# Altium PCB Micromouse_PCB.PcbDoc (part 2 of 3)
Units mm, origin at the board's own origin, x right, y up, seen from the top; angles counter-clockwise.
Board outline 75.15 x 115 mm, 2 copper layers (Top Layer, Bottom Layer); 124 components, 112 nets, 418 pads, 146 vias.
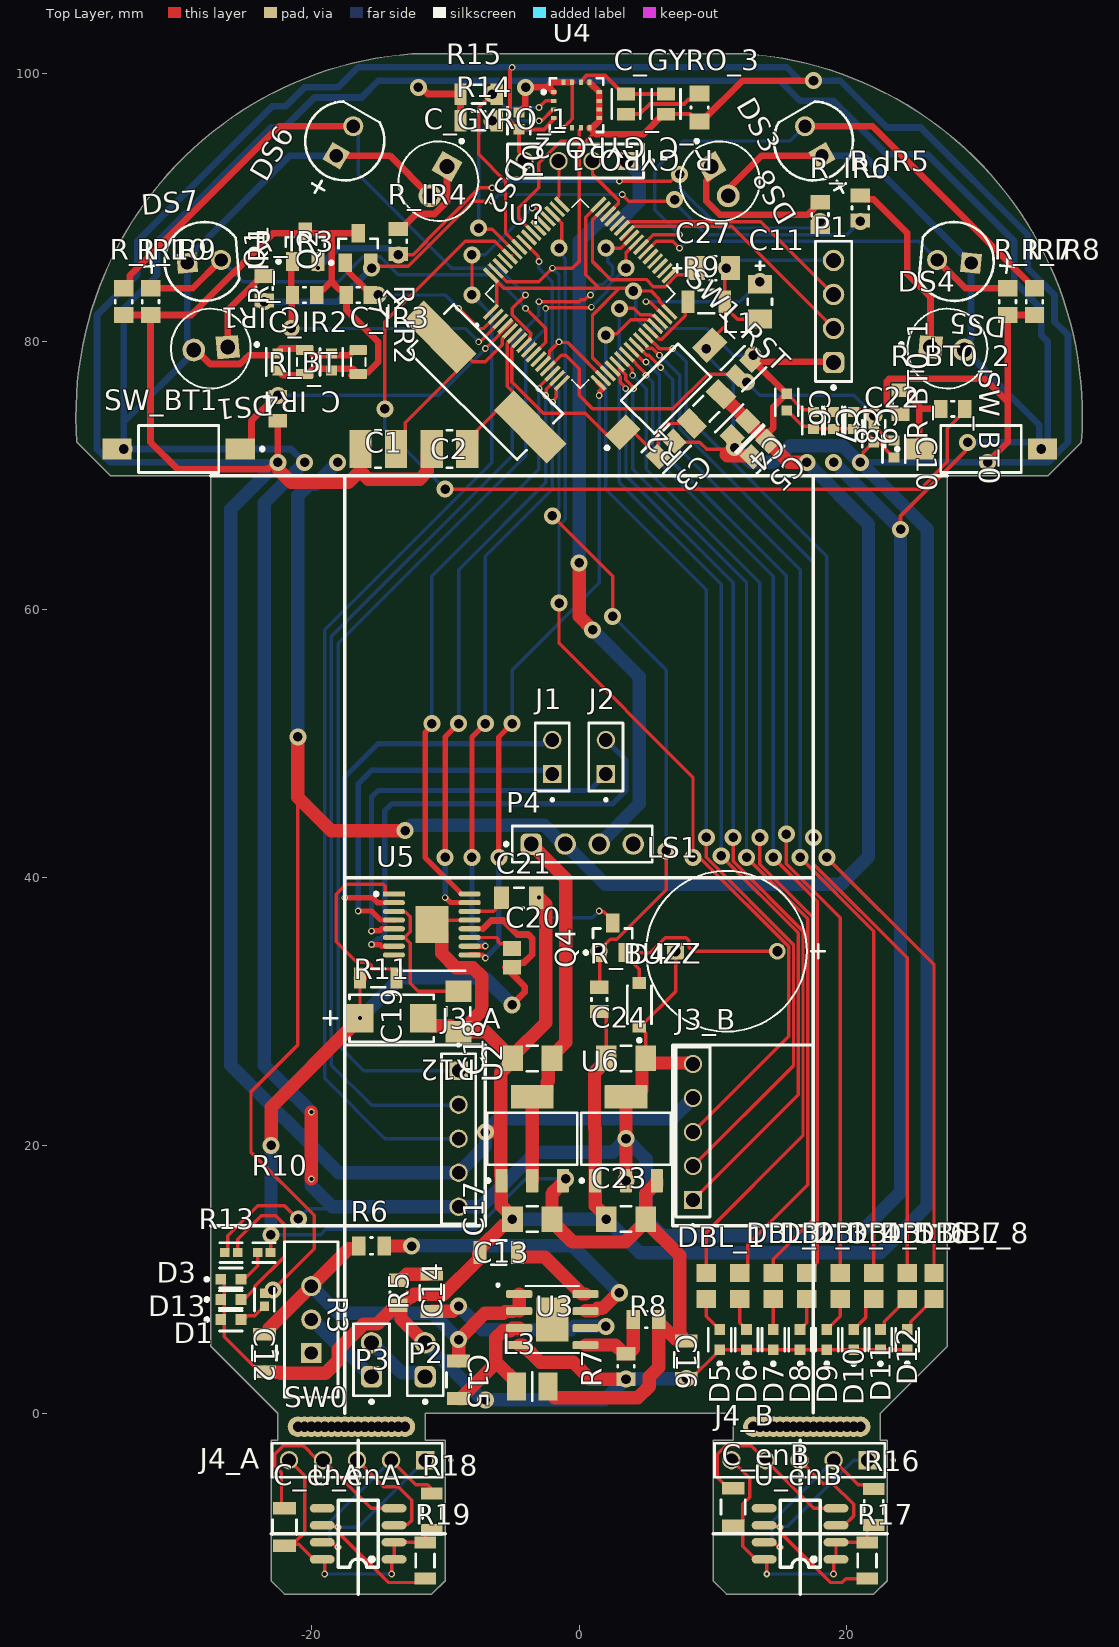
[diagram p0: Top Layer view]

## Via types
v1: diameter 1.27/1.27 (per signal layer), hole 0.711, Top Layer to Bottom Layer, 88 vias
v2: diameter 0.5, hole 0.3, Top Layer to Bottom Layer, 54 vias
v3: diameter 1.27, hole 0.711, Top Layer to Bottom Layer, 2 vias
v4: diameter 0.5, hole 0.2, Top Layer to Bottom Layer, 1 vias
v5: diameter 1, hole 0.3, Top Layer to Bottom Layer, 1 vias

## Nets (pads, with @x,y where several pads share a name; then routed paths per layer and width w, separated by ;. In a path a pad name is that pad's centre, name@x,y a point inside that pad or via, vN(x,y) a via of type N, cw(c..) or ccw(c..) an arc to the next point about the centre after c; other vN are vias at no path point) (continued)
DBL_2: (continued)
  Bottom Layer w0.254: v2(4.077,76.5) 4.03,76.453 4.03,76.279 4,76.249 4,70.5 12.5,62 v1(12.5,41.5)
DBL_3: DBL_3.2 U?.22 | length 75.3
  Top Layer w0.254: U?.22@3.207,78.707 3.207,78.689 3.953,77.943 3.953,77.547 v2(4,77.5) ; v1(13.5,43) 13.5,41.001 17.422,37.079 17.422,14.422 14.5,11.5 DBL_3.2@14.5,10.475
  Bottom Layer w0.254: v2(4,77.5) 5,76.5 5,70.5 13.5,62 v1(13.5,43)
DBL_4: DBL_4.2 U?.23 | length 74.8
  Top Layer w0.254: U?.23@3.561,79.061 4.953,77.668 4.953,77.547 v2(5,77.5) ; v1(14.5,41.5) 17.776,38.224 17.776,11.276 17.598,11.098 17.598,11.023 17.05,10.475 DBL_4.2@17,10.475
  Bottom Layer w0.254: v2(5,77.5) 5.5,77 5.5,71.5 14.5,62.5 v1(14.5,41.5)
DBL_5: DBL_5.2 U?.24 | length 75.5
  Top Layer w0.254: U?.24@3.914,79.414 4.781,78.547 4.953,78.547 v2(5,78.5) ; v1(15.479,43.244) 15.479,41.022 19.5,37.001 DBL_5.2@19.5,10.475
  Bottom Layer w0.254: v2(5,78.5) 6,77.5 6,72 15.479,62.521 v1(15.479,43.244)